# EAGLE board team_flag (EAGLE 7.6.0)
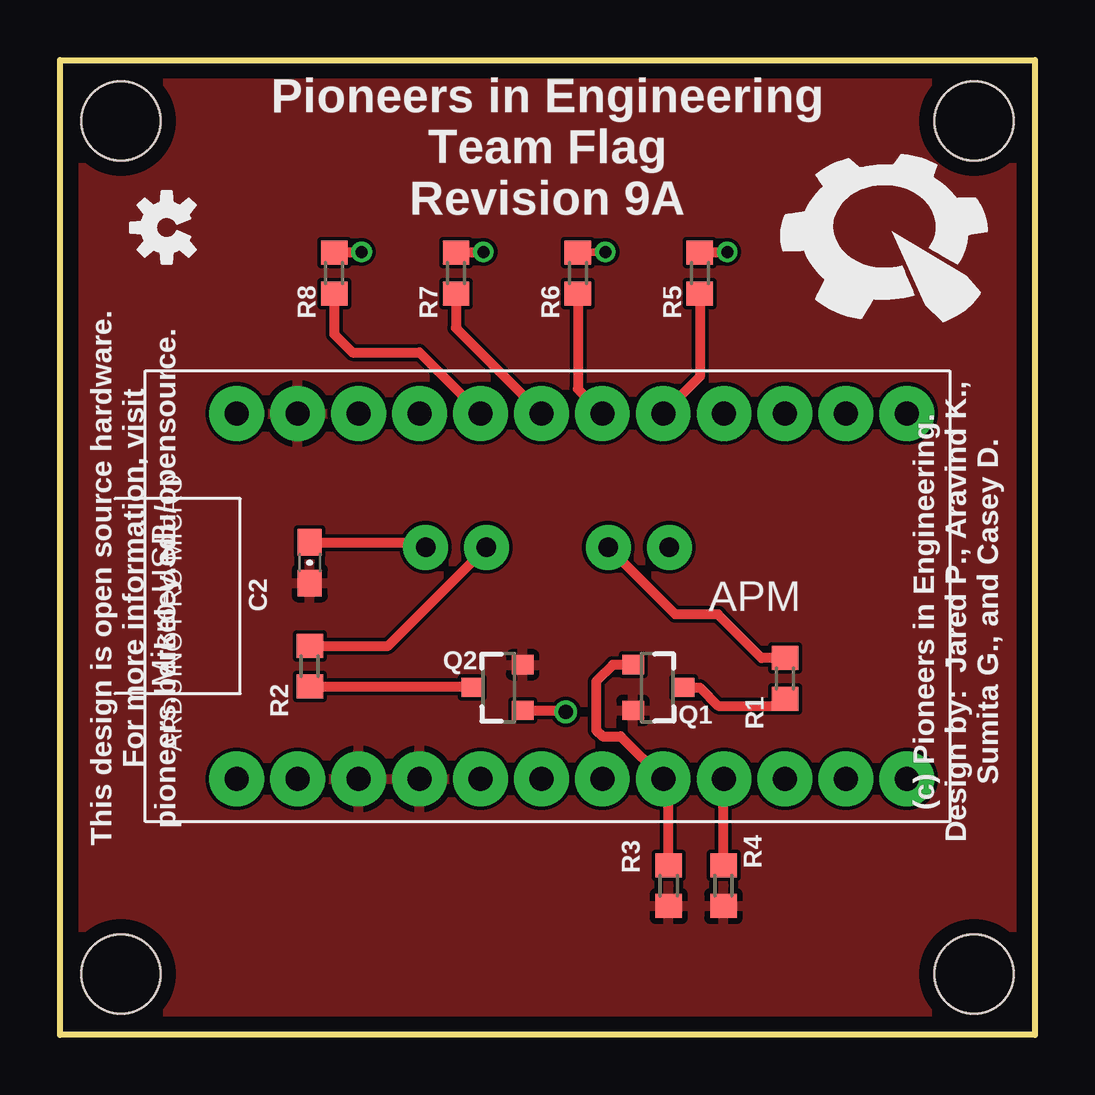
[diagram p0: board, top side]
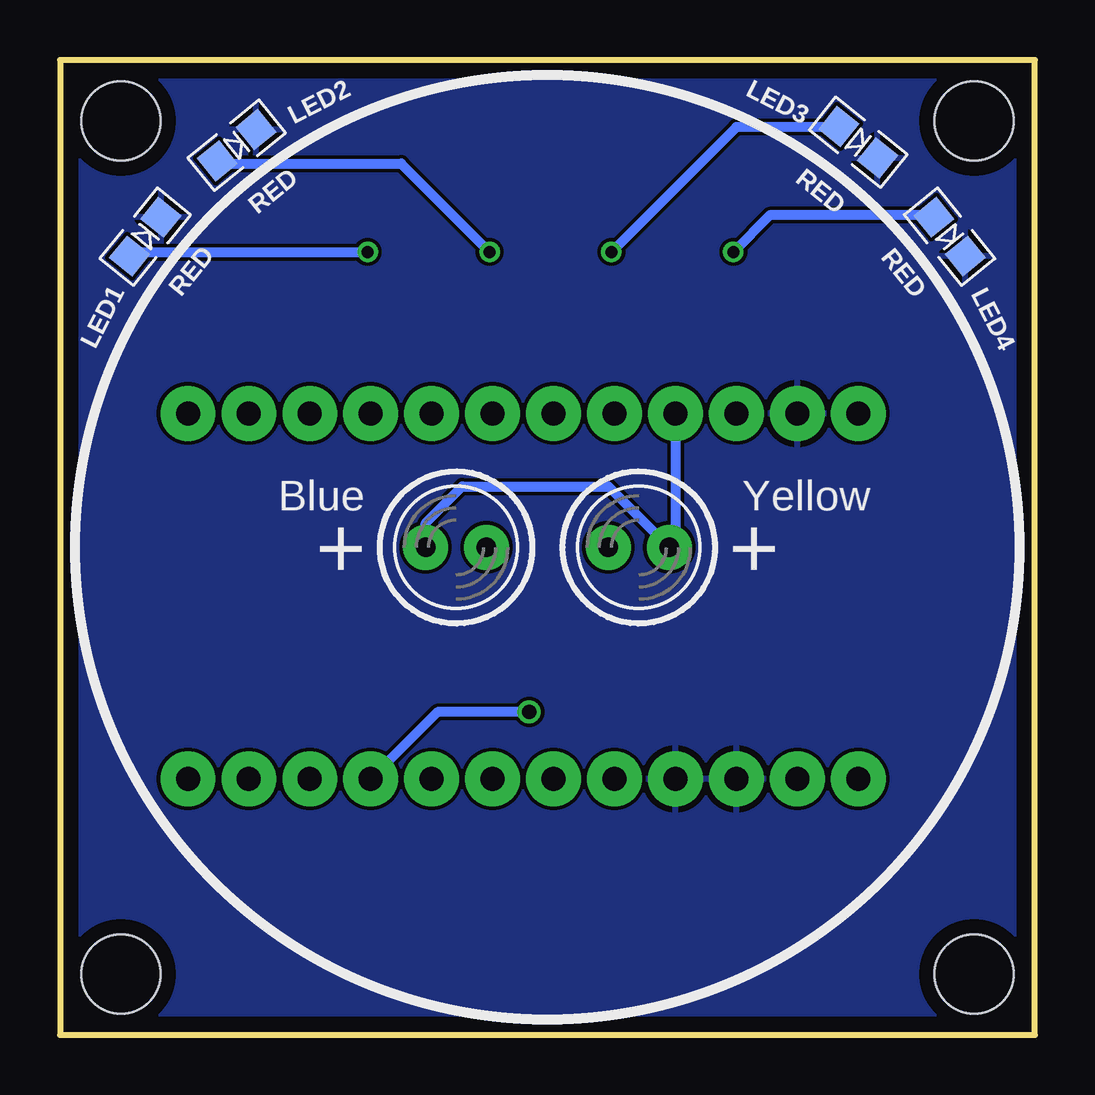
[diagram p1: board, bottom side, seen from below]

Size 40.64 x 40.64 mm. Coordinates in mm from the lower left corner, seen from the top.
Outline: 40.64,0 0,0 0,40.64 40.64,40.64 40.64,0
Copper layers (1*16): Top 2mil / dielectric 9mil / Bottom 2mil
Design rules "advancedcircuits-33each-pie": minimum track width 6mil, minimum drill 15mil, track to track 6mil, track to pad 6mil, pad to pad 6mil, via to via 6mil, smd to smd 6mil, copper to edge 25mil, drill to drill 7mil, minimum pad ring 7mil, minimum via ring 7mil, stop-mask expansion 3mil, vias tented up to drill 21mil, thermal gap 10mil

## Footprints (pad centres in the part's own frame; a part is rotated, then mirrored left to right if it is on the bottom)
ARDUINO_PRO_MICRO = drill 1 pad 2.286: 2 1.778,19.558; 3 1.778,17.018; 4 1.778,14.478; 5 1.778,11.938; 6 1.778,9.398; 7 1.778,6.858; 8 1.778,4.318; 9 1.778,1.778; 10 17.018,1.778; 14 17.018,6.858; 15 17.018,9.398; 16 17.018,4.318; A0 17.018,11.938; A1 17.018,14.478; A2 17.018,17.018; A3 17.018,19.558; GND@0 1.778,24.638; GND@1 1.778,22.098; GND@2 17.018,27.178; RAW 17.018,29.718; RST 17.018,24.638; RXI 1.778,27.178; TXO 1.778,29.718; VCC 17.018,22.098
0603-CAP = smd 1.1 x 1: 1 -0.85,0; 2 0.85,0
LED-0805 = smd 1.194 x 1.245: A -1.041,0; C 1.041,0
LED5MM-NOFLAT = drill 0.813 pad 1.88: A -1.27,0; K 1.27,0
SOT23-3 = smd 0.8 x 0.9: 1 -0.95,-1; 2 0.95,-1; 3 0,1.1
R0603 = smd 1 x 1.1: 1 -0.85,0; 2 0.85,0
STAND-OFF = hole 3.302: 0,0

## Placement (x,y rotation side)
APM  ARDUINO_PRO_MICRO  [ARDUINO_PRO_MICRO]  37.08,8.89 90 top
C2  0.1 uF  [0603-CAP]  10.41,19.68 270 top
LED1  RED  [LED-0805]  37.08,33.27 51 bottom
LED2  RED  [LED-0805]  33.27,37.08 39 bottom
LED3  RED  [LED-0805]  7.37,37.21 321 bottom
LED4  RED  [LED-0805]  3.56,33.27 309 bottom
LED5_  BLUE  [LED5MM-NOFLAT]  24.13,20.32 0 bottom
LED6_  YELLOW  [LED5MM-NOFLAT]  16.51,20.32 180 bottom
Q1  IRFML8244  [SOT23-3]  24.89,14.48 270 top
Q2  IRFML8244  [SOT23-3]  18.29,14.48 90 top
R1  200  [R0603]  30.23,14.86 90 top
R2  200  [R0603]  10.41,15.37 90 top
R3  10k  [R0603]  25.37,6.22 90 top
R4  10k  [R0603]  27.66,6.22 90 top
R5  130  [R0603]  26.67,31.75 270 top
R6  130  [R0603]  21.59,31.75 270 top
R7  130  [R0603]  16.51,31.75 270 top
R8  130  [R0603]  11.43,31.75 270 top
U$1  [PIE-LOGO-SMALL]  34.67,33.53 0 top
U$2  [OSHW-LOGO-S]  4.45,33.66 90 top
U$11  [STAND-OFF]  38.1,38.1 0 top
U$12  [STAND-OFF]  2.54,38.1 0 top
U$13  [STAND-OFF]  2.54,2.54 0 top
U$14  [STAND-OFF]  38.1,2.54 0 top

## Library data of the parts
APM U$1 U$2 U$11-U$14 = pie
C2 = pie; PIE-INT-REF-NUM: CAPACITOR-GENERIC
LED1-LED4 LED5_ LED6_ = pie; PIE-INT-REF-NUM: LED
Q1 Q2 = pie; PIE-INT-REF-NUM: NMOS
R1-R8 = pie; PIE-INT-REF-NUM: RESISTOR-GENERIC

## Nets
5V: APM.VCC C2.1 LED5_.A LED6_.A
BLUE(IO1): APM.5 Q1.1 R3.2
BSOURCE: Q1.3 R1.1
GND: APM.GND@0 APM.GND@1 APM.GND@2 C2.2 LED1.C LED2.C LED3.C LED4.C Q1.2 Q2.2 R3.1 R4.1
LED1: APM.A0 R5.2
LED1R: LED1.A R5.1
LED2: APM.A1 R6.2
LED2R: LED2.A R6.1
LED3: APM.A2 R7.2
LED3R: LED3.A R7.1
LED4: APM.A3 R8.2
LED4R: LED4.A R8.1
N$2: LED5_.K R1.2
N$3: LED6_.K R2.2
YELLOW(IO2): APM.6 Q2.1 R4.2
YSOURCE: Q2.3 R2.1

## Tracks (layer width: path | path; a pad name or v marks a point on that pad's centre or on a via)
5V
  Top 0.406: C2.1 15.03,20.54 LED6_.A
  Bottom 0.406: APM.VCC 14.99,20.57 LED6_.A 17.78,22.86 23.88,22.86 25.4,21.34 LED5_.A
BLUE(IO1)
  Top 0.406: Q1.1 23.05,15.43 22.35,14.73 22.35,12.7 22.61,12.45 23.37,12.45 APM.5 25.38,10.44 R3.2
BSOURCE
  Top 0.406: Q1.3 26.67,14.48 27.43,13.72 29.93,13.72 R1.1
GND
  pour Top: 0,40.64 40.64,40.64 40.64,0 0,0
  pour Bottom (rank 2): 40.64,0 0,0 0,40.64 40.64,40.64
LED1
  Top 0.406: R5.2 26.67,27.43 APM.A0
LED1R  (via drill 0.5)
  Top 0.305: R5.1 26.71,32.64
  Top 0.406: 26.71,32.64 v27.81,32.64
  Bottom 0.305: 37.56,32.64 LED1.A
  Bottom 0.406: 37.56,32.64 v27.81,32.64
LED2
  Top 0.406: R6.2 21.59,26.92 APM.A1
LED2R  (via drill 0.5)
  Top 0.305: R6.1 21.63,32.64 v22.73,32.64
  Bottom 0.305: LED2.A 33.98,36.32
  Bottom 0.406: 33.98,36.32 26.42,36.32 v22.73,32.64
LED3
  Top 0.406: R7.2 16.51,29.46 APM.A2
LED3R  (via drill 0.5)
  Top 0.305: R7.1 16.55,32.64
  Top 0.406: 16.55,32.64 v17.65,32.64
  Bottom 0.305: 8.2,37.85 LED3.A
  Bottom 0.406: 8.2,37.85 12.45,37.85 v17.65,32.64
LED4
  Top 0.406: R8.2 11.43,29.21 12.19,28.45 14.99,28.45 APM.A3
LED4R  (via drill 0.5)
  Top 0.305: R8.1 11.47,32.64
  Top 0.406: 11.47,32.64 v12.57,32.64
  Bottom 0.305: 4.29,34.16 LED4.A
  Bottom 0.406: 4.29,34.16 11.05,34.16 v12.57,32.64
N$2
  Top 0.406: R1.2 29.25,15.71 27.43,17.53 25.65,17.53 LED5_.K
N$3
  Top 0.406: R2.2 13.68,16.22 LED6_.K
YELLOW(IO2)  (via drill 0.6)
  Top 0.406: Q2.1 21.02,13.53 v21.08,13.46 | R4.2 27.66,10.64 APM.6
  Bottom 0.406: v21.08,13.46 24.89,13.46 APM.6
YSOURCE
  Top 0.406: R2.1 17.15,14.52 Q2.3

## Text on the board
tPlace: Pioneers in Engineering / Team Flag / Revision 9A | This design is open source hardware. / For more information, visit / pioneers.berkeley.edu/opensource. | (c) Pioneers in Engineering. / Design by: Jared P., Aravind K., / Sumita G., and Casey D.
bPlace: Yellow | Blue
tNames: ARDUINO PRO MICRO